# Altium PCB v0.PcbDoc
Units mm, origin at the board's own origin, x right, y up, seen from the top; angles counter-clockwise.
Board outline 86 x 23 mm, 2 copper layers (Top Layer, Bottom Layer), stack 1.661 mm thick; 25 components, 69 nets, 135 pads, 31 vias.
Unrouted connection lines stored in the file: 1.
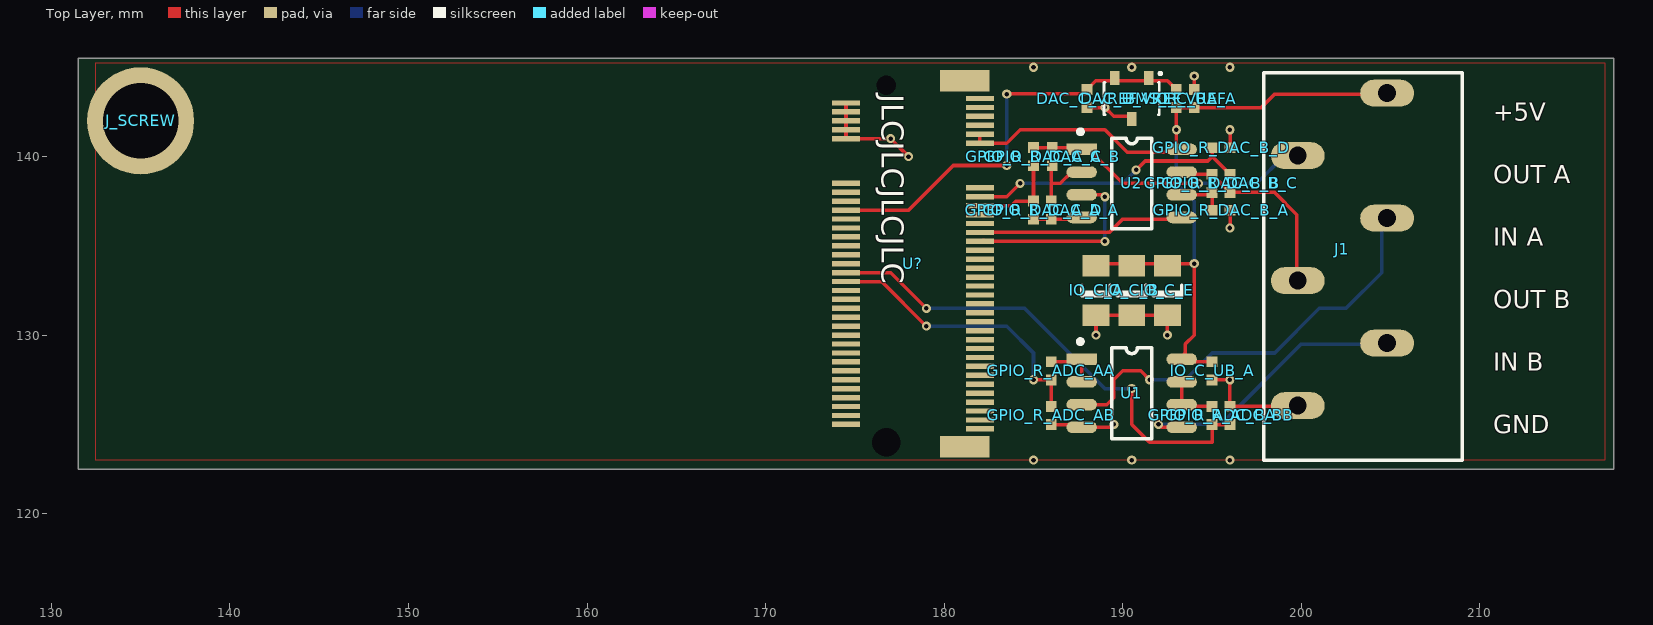
[diagram p0: Top Layer view]
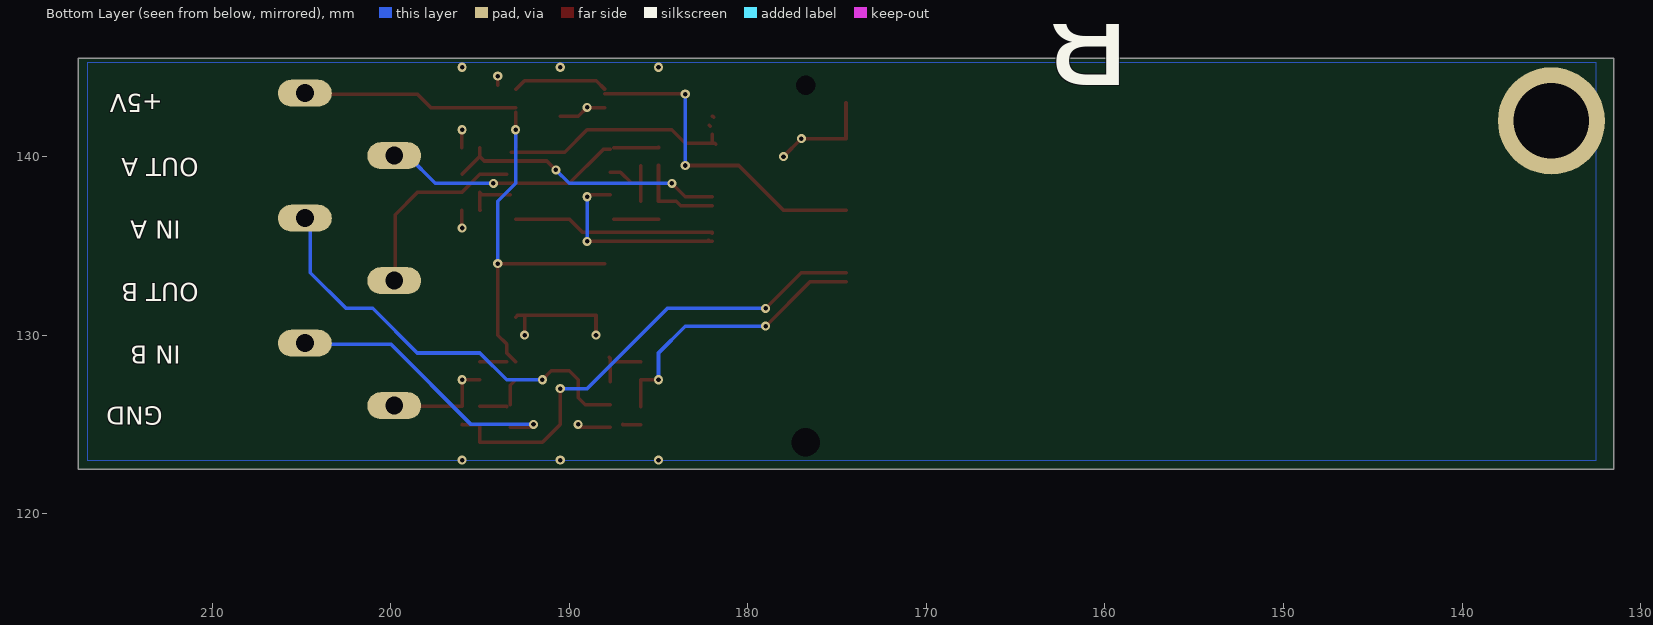
[diagram p1: Bottom Layer view, seen from below]
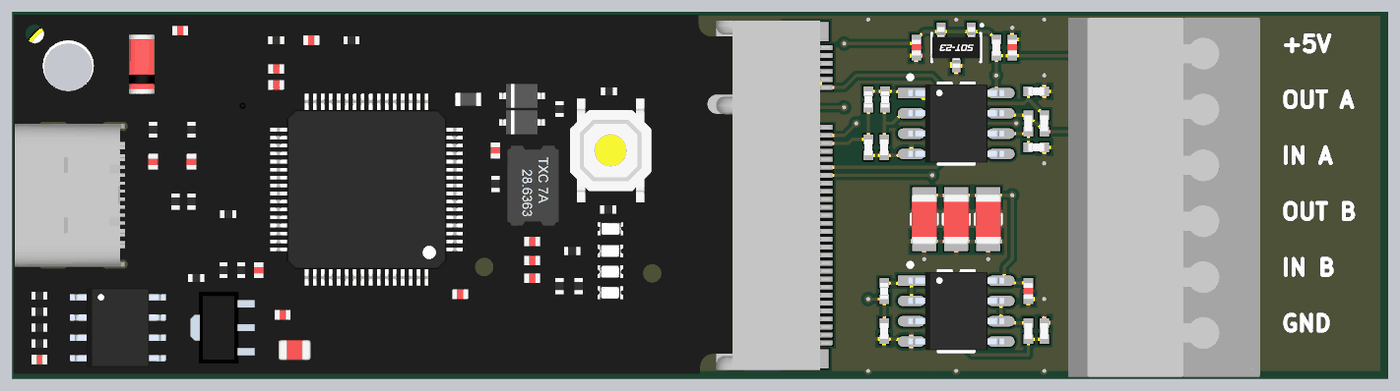
[diagram p2: 3D render of the assembled board from above, using the file's embedded part models]

## Layer stack, top to bottom
Top Solder: solder mask 0.0102, Solder Resist, Dk 3.5
Top Layer: signal copper 0.0356
Dielectric 1: core 1.59, FR-4, Dk 4.2
Bottom Layer: signal copper 0.0356
Bottom Solder: solder mask 0.0102, Solder Resist, Dk 3.5

## Board outline
131.5,122.5 131.5,145.5 217.5,145.5 217.5,122.5

## Design rules (kind name [scope] priority, off if disabled: settings)
Clearance [All] p1: gap=0.2 ignorepadtopadclearanceinfootprint=FALSE except(0: Arc-Hole Track-Hole SMDPad-Hole THPad-Hole Via-Hole Fill-Hole Poly-Hole Region-Hole Text-Hole)
PolygonConnect [All] p1: thpad.connectstyle=Relief thpad.reliefconductorwidth=0.254 thpad.reliefentries=4 thpad.polygonreliefangle="90 Angle" thpad.airgapwidth=0.254 smdpad.connectstyle=Relief smdpad.reliefconductorwidth=0.254 smdpad.reliefentries=4 smdpad.polygonreliefangle="90 Angle" smdpad.airgapwidth=0.254 via.connectstyle=Direct via.reliefconductorwidth=0.254 via.reliefentries=4 via.polygonreliefangle="90 Angle" via.airgapwidth=0.254
RoutingVias [All] p1: holewidth=0.711 width=1.27 viastyle="Through Hole" minholewidth=0.711 minwidth=1.27 maxholewidth=0.711 maxwidth=1.27
SolderMaskExpansion [All] p1: expansion=0.102
Width [All] p1: maxlimit=1 minlimit=0.15 preferedwidth=0.2
30 further rules are at their usual default settings.

## Components (designator, comment, footprint, x,y, rotation, side; value= is the part's Value field where it differs from the comment)
BMS_R_VREF "0402WGF1001TCE" R_0402 193,143.25 r90 top value=1k
DAC_C_VREF "CL05A105KA5NQNC" C_0402 188,143.25 r90 top value=1uF
DAC_U_VREF "TLV431BQDBZR" TO-236AB 190.5,143.25 r270 top
GPIO_R_ADC_AA "0402WGF1001TCE" R_0402 186,128 r90 top value=1k
GPIO_R_ADC_AB "0402WGF1501TCE" R_0402 186,125.5 r90 top value=1.5k
GPIO_R_ADC_BA "0402WGF1001TCE" R_0402 195,125.5 r270 top value=1k
GPIO_R_ADC_BB "0402WGF1501TCE" R_0402 196,125.5 r270 top value=1.5k
GPIO_R_DAC_A_A "0402WGF1501TCE" R_0402 186,137 r90 top value=1.5k
GPIO_R_DAC_A_B "0402WGF1001TCE" R_0402 186.057,140 r90 top value=1k
GPIO_R_DAC_A_C "0402WGF1001TCE" R_0402 185,140 r270 top value=1k
GPIO_R_DAC_A_D "0402WGF1501TCE" R_0402 185,137 r90 top value=1.5k
GPIO_R_DAC_B_A "0402WGF1501TCE" R_0402 195.5,137 r180 top value=1.5k
GPIO_R_DAC_B_B "0402WGF1001TCE" R_0402 195,138.5 r90 top value=1k
GPIO_R_DAC_B_C "0402WGF1001TCE" R_0402 196,138.5 r90 top value=1k
GPIO_R_DAC_B_D "0402WGF1501TCE" R_0402 195.5,140.5 r180 top value=1.5k
IO_C_A "CL31A226KAHNNNE" C_1206 188.5,132.5 r90 top value=22uF
IO_C_B "CL31A226KAHNNNE" C_1206 190.5,132.5 r90 top value=22uF
IO_C_E "CL31A226KAHNNNE" C_1206 192.5,132.5 r90 top value=22uF
IO_C_UA_A "CL05A105KA5NQNC" C_0402 194,143.25 r270 top value=1uF
IO_C_UB_A "CL05A105KA5NQNC" C_0402 195,128 r90 top value=1uF
J1 "250-206/000-006" P-250-206 203.5,134 r0 top
J_SCREW "SMTSO3020CTJ" SMTSO3020CTJ 135,142 r90 top
U1 "LM324" SOIC-8-P1.27-W3.5 190.5,126.75 r0 top
U2 "LM324" SOIC-8-P1.27-W3.5 190.5,138.5 r0 top
U? "BITSNAP_GF_B" POWERNET-USB 178.5,134 r90 top

## Footprints (in the part's own frame and the unit in brackets; to place one, negate y for a bottom-side part, rotate by r counter-clockwise, add the part's x,y. Pads: shape width x height; smd on the part's side, far side on the other; paste and mask are expansions set on the pad)
C_0402 [mm] "Chip Capacitor; Body 1.0 x 0.5 mm (LxW typ)"
  rect 0.6x0.6 smd: 1(-0.508,0) 2(0.508,0)
  body extent -0.5,-0.3 0.5,0.3, height 0.2
C_1206 [mm] "Chip Capacitor; Body 3.2 x 1.6 mm (LxW typ)"
  rect 1.2x1.5 smd: 1(-1.395,0) 2(1.395,0)
  silkscreen extent -0.3,-0.8 0.3,0.8, body extent -1.6,-0.8 1.6,0.8, height 1
P-250-206 [mm]
  oval 3.016x1.508 hole 1: L1(1.3,9.55) L2(-3.7,6.05) L3(1.3,2.55) L4(-3.7,-0.95) L5(1.3,-4.45) L6(-3.7,-7.95)
  silkscreen extent -5.6,-11 5.5,10.7, body extent -6,-11.38 6,11.12, height 13.35
POWERNET-USB [mm] "IC - Powernet USB - NGFF B KEY, TE 2199119-3"
  rect 0.3x1.55 smd: 1(9.25,-3.5) 2(9,4) 3(8.75,-3.5) 4(8.5,4) 5(8.25,-3.5) 6(8,4) 7(7.75,-3.5) 8(7.5,4) 9(7.25,-3.5) 10(7,4) 11(6.75,-3.5) 20(4.5,4) 21(4.25,-3.5) 22(4,4) 23(3.75,-3.5) 24(3.5,4) 25(3.25,-3.5) 26(3,4) 27(2.75,-3.5) 28(2.5,4) 29(2.25,-3.5) 30(2,4) 31(1.75,-3.5) 32(1.5,4) 33(1.25,-3.5) 34(1,4) 35(0.75,-3.5) 36(0.5,4) 37(0.25,-3.5) 38(0,4) 39(-0.25,-3.5) 40(-0.5,4) 41(-0.75,-3.5) 42(-1,4) 43(-1.25,-3.5) 44(-1.5,4) 45(-1.75,-3.5) 46(-2,4) 47(-2.25,-3.5) 48(-2.5,4) 49(-2.75,-3.5) 50(-3,4) 51(-3.25,-3.5) 52(-3.5,4) 53(-3.75,-3.5) 54(-4,4) 55(-4.25,-3.5) 56(-4.5,4) 57(-4.75,-3.5) 58(-5,4) 59(-5.25,-3.5) 60(-5.5,4) 61(-5.75,-3.5) 62(-6,4) 63(-6.25,-3.5) 64(-6.5,4) 65(-6.75,-3.5) 66(-7,4) 67(-7.25,-3.5) 68(-7.5,4) 69(-7.75,-3.5) 70(-8,4) 71(-8.25,-3.5) 72(-8.5,4) 73(-8.75,-3.5) 74(-9,4) 75(-9.25,-3.5)
  round 0 hole 1.6 unplated: 76(-10,1.75)
  round 0 hole 1.1 unplated: 76(10,1.75)
  rect 1.2x2.75 smd: M(-10.25,-2.65) M(10.25,-2.65)
  Bottom Layer pour cut-out: -17.2,17.6
  Bottom Layer pour cut-out: -17.2,17.6
  body extent -11.19,-4.1 11.31,46.9, height 5.46
R_0402 [mm] "Body 1.0 x 0.5 mm (LxW typ)"
  rect 0.6x0.6 smd: 1(-0.508,0) 2(0.508,0)
  body extent -0.5,-0.25 0.5,0.25, height 0.35
SMTSO3020CTJ [mm] "PCB Nut"
  round 6 hole 4.22: 1(0,0)
  body extent -2.78,-2.78 2.78,2.78, height 1.92
SOIC-8-P1.27-W3.5 [mm]
  rect 1.7x0.65 smd: 1(-2.8,1.9)
  oval 1.7x0.65 smd: 2(-2.8,0.63) 3(-2.8,-0.64) 4(-2.8,-1.91) 5(2.8,-1.91) 6(2.8,-0.64) 7(2.8,0.63) 8(2.8,1.9)
  silkscreen extent -3,-2.55 1.12,3.01, body extent -3,-2.45 3,2.45, height 1.5
TO-236AB [mm] "SOT-23-3 Leads; Body 3.1 x 3 mm, inc. leads (LxW max)"
  rect 0.8x0.55 smd: 1(-1.15,0.95) 2(-1.15,-0.95) 3(1.15,0)
  silkscreen extent -1.45,-1.55 0.9,1.65, body extent -1.28,-1.5 1.27,1.5, height 1

## Part data
BMS_R_VREF GPIO_R_ADC_AA GPIO_R_ADC_BA GPIO_R_DAC_A_B GPIO_R_DAC_A_C GPIO_R_DAC_B_B GPIO_R_DAC_B_C: "R - RESISTOR - SMD - 1k - 1% - 0402", JLC Availability=Basic, LCSC Part #=C11702
DAC_C_VREF IO_C_UA_A IO_C_UB_A: "C - CAPACITOR - MLCC - 1uF - 25V - 0402", JLC Availability=Basic, LCSC Part #=C52923, WVDC=16
DAC_U_VREF: "U - IC - ADJUSTABLE SHUNT REGULATOR", JLC Availability=Extended, LCSC Part #=C398374, VOut=ADJ
GPIO_R_ADC_AB GPIO_R_ADC_BB GPIO_R_DAC_A_A GPIO_R_DAC_A_D GPIO_R_DAC_B_A GPIO_R_DAC_B_D: "R - RESISTOR - SMD - 1.5k - 1% - 0402", JLC Availability=Basic, LCSC Part #=C25867
IO_C_A IO_C_B IO_C_E: "C - CAPACITOR - MLCC - 22uF - 25V - 1206", JLC Availability=Basic, LCSC Part #=C12891, WVDC=25V
J1: "J - 6 Position Wire to Board Terminal Block 45° (135°) Angle with Board 0.138 (3.50mm) Through Hole", LCSC Part #=C2765065, Availability="In Stock", Check_prices=https://www.snapeda.com/parts/250-206/000-006/WAGO/view-part/?ref=eda, MF="WAGO Innovative Connections", MP=250-206/000-006, Price=None, Purchase-URL=https://pricing.snapeda.com/search?q=250-206/000-006&ref=eda, SnapEDA_Link=https://www.snapeda.com/parts/250-206/000-006/WAGO/view-part/?ref=snap
J_SCREW: "J - PCB NUT - M3 x 2", JLC Availability=Extended, LCSC Part #=C2916381
U1 U2: library part LMV358IDR, "U - IC - OP AMP (QUAD)", JLC Availability=Extended, LCSC Part #=C63813, Speed=0.4V/us
U?: library part POWERNET_USB, "U - IC - Bitsnap CPU, NGFF B Key", LCSC Part #=C2761344, Manufacturer=Foxconn, Manufacturer P/N=AS0BC21-S30BB-7H

## Via types
v1: diameter 0.508, hole 0.254, Top Layer to Bottom Layer, tented both sides, 31 vias

## Nets (pads, with @x,y where several pads share a name; then routed paths per layer and width w, separated by ;. In a path a pad name is that pad's centre, name@x,y a point inside that pad or via, vN(x,y) a via of type N, cw(c..) or ccw(c..) an arc to the next point about the centre after c; other vN are vias at no path point)
&^~PB6_SCL1: U?.54
&^~PB7_SDA1: U?.52
&~PA1_ADC1: GPIO_R_ADC_BA.2 GPIO_R_ADC_BB.2 U?.40 | length 27.6
  Top Layer w0.2: U?.40 177,133.5 v1(179,131.5) ; v1(190.5,127) 190.5,125 191.5,124 195,124 GPIO_R_ADC_BA.2 195.992,124.992 GPIO_R_ADC_BB.2@196,125
  Bottom Layer w0.2: v1(179,131.5) 184.5,131.5 189,127 v1(190.5,127)
^PA15: U?.75
^PB2_BOOT1: U?.28
^PB4: U?.65
^PB10_SCL2_RX3: U?.22
^PB11_SDA2_TX3: U?.20
^PB12_SS2: U?.21
^PB13_SCK2: U?.30
^PB14_MISO2: U?.32
^PB15_MOSI2: U?.34
^~PA8: U?.60
^~PA9_TX1: U?.62
^~PA10_RX1: U?.64
ADC_A: J1.L3 U1.3 | length 23.9
  Top Layer w0.2: U1.3 189.11,126.11 189.5,126.5 189.5,127.5 190,128 191,128 v1(191.5,127.5)
  Bottom Layer w0.2: v1(191.5,127.5) 193.5,127.5 195,129 198.5,129 201,131.5 202.5,131.5 204.5,133.5 J1.L3@204.5,136.5
ADC_B: J1.L5 U1.5 | length 16.2
  Top Layer w0.2: v1(192,125) 192.16,124.84 U1.5
  Bottom Layer w0.2: v1(192,125) 195.5,125 200,129.5 J1.L5@205,129.5
DAC_A: GPIO_R_DAC_A_B.2 GPIO_R_DAC_A_C.1 J1.L2 U2.1 | length 15.2
  Top Layer w0.2: GPIO_R_DAC_A_C.1 185.008,140.5 U2.1@187.5,140.5 ; U2.1 188.1,140.4 190,138.5 v1(194.25,138.5)
  Bottom Layer w0.2: v1(194.25,138.5) 197.5,138.5 J1.L2@199,140
DAC_A_FB: GPIO_R_DAC_A_C.2 GPIO_R_DAC_A_D.2 U?.25 | length 5.1
  Top Layer w0.2: U?.25 183.75,137.25 184,137.5 GPIO_R_DAC_A_D.2@185,137.5 ; GPIO_R_DAC_A_D.2 GPIO_R_DAC_A_C.2 GPIO_R_DAC_A_C.2@185,139.5
DAC_B: GPIO_R_DAC_B_B.2 GPIO_R_DAC_B_C.1 J1.L4 U2.7 | length 10.4
  Top Layer w0.2: U2.7@193.5,139 193.508,139.008 GPIO_R_DAC_B_B.2 196,138.008 GPIO_R_DAC_B_C.1@196,138 ; GPIO_R_DAC_B_C.1 198.508,137.992 199.75,136.75 J1.L4@199.75,133.5
DAC_B_FB: GPIO_R_DAC_B_C.2 GPIO_R_DAC_B_D.2 U?.23 | length 15.8
  Top Layer w0.2: U?.23 183.5,137.75 v1(184.25,138.5) ; v1(190.75,139.25) 191.25,139.75 194.75,139.75 195,140 ; GPIO_R_DAC_B_D.2@195,140.5 195,140.008 GPIO_R_DAC_B_C.2
  Bottom Layer w0.2: v1(184.25,138.5) 190,138.5 v1(190.75,139.25)
DAC_VREF: BMS_R_VREF.2 DAC_C_VREF.2 DAC_U_VREF.1 DAC_U_VREF.2 U?.26 | length 23.9
  Top Layer w0.2: U?.26 178,137 180.5,139.5 v1(183.5,139.5) ; v1(183.5,143.5) 183.508,143.508 DAC_C_VREF.2@188,143.508 ; DAC_C_VREF.2 188.492,144.25 192.5,144.25 192.992,143.758 BMS_R_VREF.2
  Bottom Layer w0.2: v1(183.5,139.5) v1(183.5,143.5)
eth_V+: U?.1
eth_V-: U?.3
GPIO_A: GPIO_R_ADC_AA.1 GPIO_R_ADC_AB.2 U?.42 | length 16.2
  Top Layer w0.2: U?.42 176.5,133 v1(179,130.5) ; v1(185,127.5) 185.992,127.5 GPIO_R_ADC_AA.1 GPIO_R_ADC_AB.2 GPIO_R_ADC_AB.2@186,126
  Bottom Layer w0.2: v1(179,130.5) 183.5,130.5 185,129 v1(185,127.5)
GPIO_C: U?.43
GPIO_D: U?.35
GPIO_E: U?.49
GPIO_F: U?.47
GPIO_G: U?.45
GPIO_H: U?.46
LB_5V: BMS_R_VREF.1 IO_C_A.2 IO_C_B.2 IO_C_E.2 IO_C_UA_A.2 IO_C_UB_A.2 J1.L1 U1.8 U2.8 U?.9 U?.11 | length 47.4
  Top Layer w0.2: U?.11@181.8,140.7 181.85,140.75 U?.11 183.5,140.75 184.25,141.5 189,141.5 190.25,140.25 U2.8@193.25,140.25 ; U?.11@182,140.8 U?.9 ; IO_C_A.2@188,134 v1(194,134) 194,130 193.5,129.5 193.5,129 U1.8@193,128.5 ; U2.8@193,140.5 v1(193,141.5) BMS_R_VREF.1@193,142.492 ; BMS_R_VREF.1 IO_C_UA_A.2 197.742,142.742 198.5,143.5 J1.L1@204,143.5 ; U1.8@193.5,128.5 193.508,128.508 IO_C_UB_A.2
  Bottom Layer w0.2: v1(193,141.5) 193,138.5 194,137.5 v1(194,134)
LB_DAC_A_N: GPIO_R_DAC_A_A.2 GPIO_R_DAC_A_B.1 U2.2 | length 4
  Top Layer w0.2: GPIO_R_DAC_A_A.2@186,137.5 186,138.5 ; GPIO_R_DAC_A_B.1@186,139.492 186,138.5 ; U2.2 187.13,139.13 186.5,138.5 186,138.5
LB_DAC_B_N: GPIO_R_DAC_B_A.2 GPIO_R_DAC_B_B.1 U2.6 | length 2.8
  Top Layer w0.2: U2.6 194.86,137.86 195,138 GPIO_R_DAC_B_B.1 195,137.008 GPIO_R_DAC_B_A.2
LB_GND: DAC_C_VREF.1 DAC_U_VREF.3 GPIO_R_ADC_AB.1 GPIO_R_ADC_BB.1 GPIO_R_DAC_A_A.1 GPIO_R_DAC_A_D.1 GPIO_R_DAC_B_A.1 GPIO_R_DAC_B_D.1 IO_C_A.1 IO_C_B.1 IO_C_E.1 IO_C_UA_A.1 IO_C_UB_A.1 J1.L6 U1.4 U2.4 U?.2 U?.4 U?.6 U?.8 U?.10 | length 29.2
  Top Layer w0.2: U?.2 U?.4 U?.6 U?.8 U?.10 v1(177,141) v1(178,140) ; GPIO_R_DAC_A_D.1 GPIO_R_DAC_A_A.1 187.492,136.492 U2.4@187.5,136.5 ; GPIO_R_ADC_AB.1 186.992,124.992 U1.4@187,125 ; U1.4 189.34,124.84 v1(189.5,125) ; DAC_C_VREF.1 188.992,142.742 v1(189,142.75) 189.5,142.25 DAC_U_VREF.3@190.5,142.25 ; v1(188.5,130) IO_C_A.1 IO_C_B.1 IO_C_E.1 ; v1(192.5,130) IO_C_E.1 ; IO_C_E.1@193,131 192.895,131.105 IO_C_E.1 ; IO_C_UA_A.1@194,144 v1(194,144.5) ; IO_C_UB_A.1 195.008,127.5 v1(196,127.5) GPIO_R_ADC_BB.1 199.492,126.008 J1.L6@199.5,126 ; v1@196.008,136.008 GPIO_R_DAC_B_A.1 ; GPIO_R_DAC_B_D.1 v1@196.008,141.492
  other v1: 185,123 190.5,123 196,123 196,136 196,141.5 185,145 190.5,145 196,145
LB_SWDCK: U?.68
LB_SWDIO: U?.70
LB_USB_CC1: U?.5 | length 0.1
  Top Layer w0.2: U?.5@181.9,142.2 181.95,142.25 U?.5
LB_USB_CC2: U?.7 | length 0.1
  Top Layer w0.2: U?.7@182.1,141.7 U?.7@182.15,141.75
LB_USB_DM: U?.74
LB_USB_DP: U?.72
NetGPIO_R_ADC_AA_2: GPIO_R_ADC_AA.2 U1.1 U1.2 | length 2.9
  Top Layer w0.2: GPIO_R_ADC_AA.2 186.008,128.5 U1.1@187.5,128.5 ; U1.2 U1.1 187.7,128.7 U1.1@187.75,128.75
NetGPIO_R_ADC_BA_1: GPIO_R_ADC_BA.1 U1.6 U1.7 | length 3
  Top Layer w0.2: U1.7@193,127.5 193.3,127.2 U1.6 ; U1.6@193.5,126 193.508,126.008 GPIO_R_ADC_BA.1
NRST: U?.55
PA4_ADC4_SS1: U2.3 U?.33 | length 10.9
  Top Layer w0.2: U?.33 U?.33@182.25,135.25 ; U?.33@182.2,135.3 U?.33@182.25,135.25 ; U2.3 188.89,137.86 v1(189,137.75) ; v1(189,135.25) U?.33@182.25,135.25
  Bottom Layer w0.2: v1(189,135.25) v1(189,137.75)
PA5_ADC5_SCK1: U2.5 U?.31 | length 11.4
  Top Layer w0.2: U?.31@182,135.7 U?.31@182.05,135.75 ; U?.31 U?.31@182.05,135.75 ; U2.5@193,136.5 190,136.5 189.25,135.75 U?.31@182.05,135.75
PB3: U?.66
PB5: U?.63
PC6: U?.36
PC7: U?.38
PC8: U?.56
PC9: U?.58
PC10: U?.73
PC11: U?.71
PC12: U?.69
PC13: U?.57
PC14: U?.50
PC15: U?.48
PD2: U?.67
VCC_3V3: U?.37 U?.39
VDDA: U?.41
VSSA: U?.44
XIN: U?.53
XOUT: U?.51
~PA6_ADC6_MISO1: U?.29
~PA7_ADC7_MOSI1: U?.27
~PB1_ADC9: U?.24
~PB8_CANTX: U?.59
~PB9_CANRX: U?.61
pads on no net: J_SCREW.1 U?.76 U?.M

## Polygon pours and split planes (outlines as drawn)
LB_GND on Top Layer "Top Layer-No Net" (solid, remove dead copper, shelved, pour order 2): 132.5,123 132.5,145.25 217,145.25 217,123
no net on Top Layer "Top Layer-No Net 1" (solid, shelved, pour order 4): 194,142.75 194.25,142.75
LB_GND on Bottom Layer "Bottom Layer-No Net" (solid, remove dead copper, shelved, pour order 0): 132.5,123 132.5,145.25 217,145.25 217,123

## Silkscreen, mask and mechanical layers (free items; w line width, h text height)
Top Overlay:
  text "JLCJLCJLCJLC" at 176.5,143.5 h1.25 r270
  text "+5V" at 210.75,142 h1
  text "OUT A" at 210.75,138.5 h1
  text "IN A" at 210.75,135 h1
  text "OUT B" at 210.75,131.5 h1
  text "IN B" at 210.75,128 h1
  text "GND" at 210.75,124.5 h1
Bottom Overlay:
  text "b" at 119.961,151.875 h40 r180
  text "B" at 158.5,151 h9 r180
  text "+5V" at 212.754,143.5 h1 r180
  text "OUT A" at 210.754,139.917 h1 r180
  text "IN A" at 211.754,136.417 h1 r180
  text "OUT B" at 210.754,132.917 h1 r180
  text "IN B" at 211.754,129.417 h1 r180
  text "GND" at 212.754,126 h1 r180
Board Outline (M30):
  the board outline again, w0.05